# Altium PCB USBDAC_pcm2706.PcbDoc
Units mm, origin at the board's own origin, x right, y up, seen from the top; angles counter-clockwise.
Board outline 40 x 40 mm, 2 copper layers (Top Layer, Bottom Layer); 34 components, 30 nets, 122 pads, 25 vias.
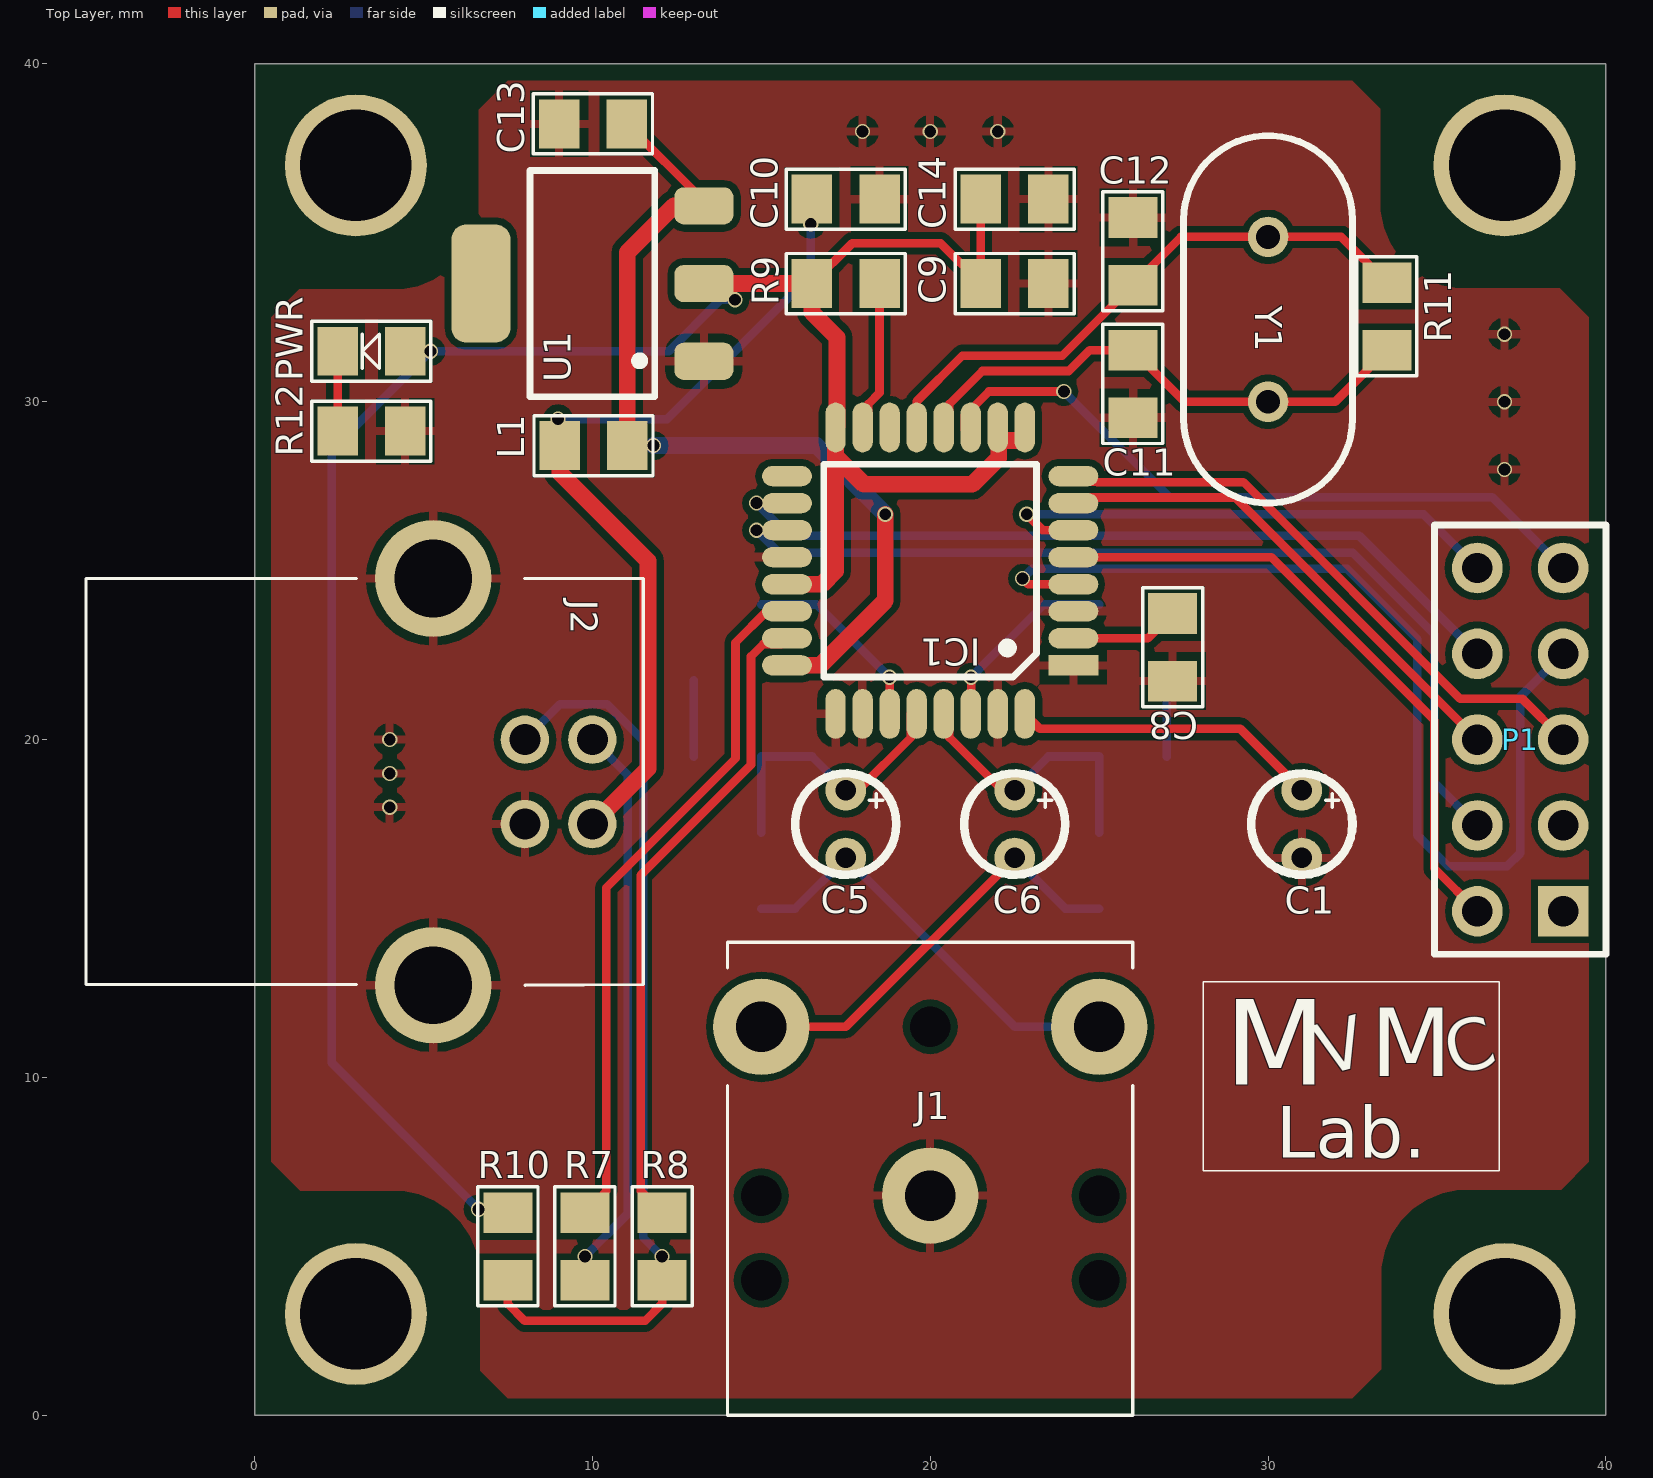
[diagram p0: Top Layer view]
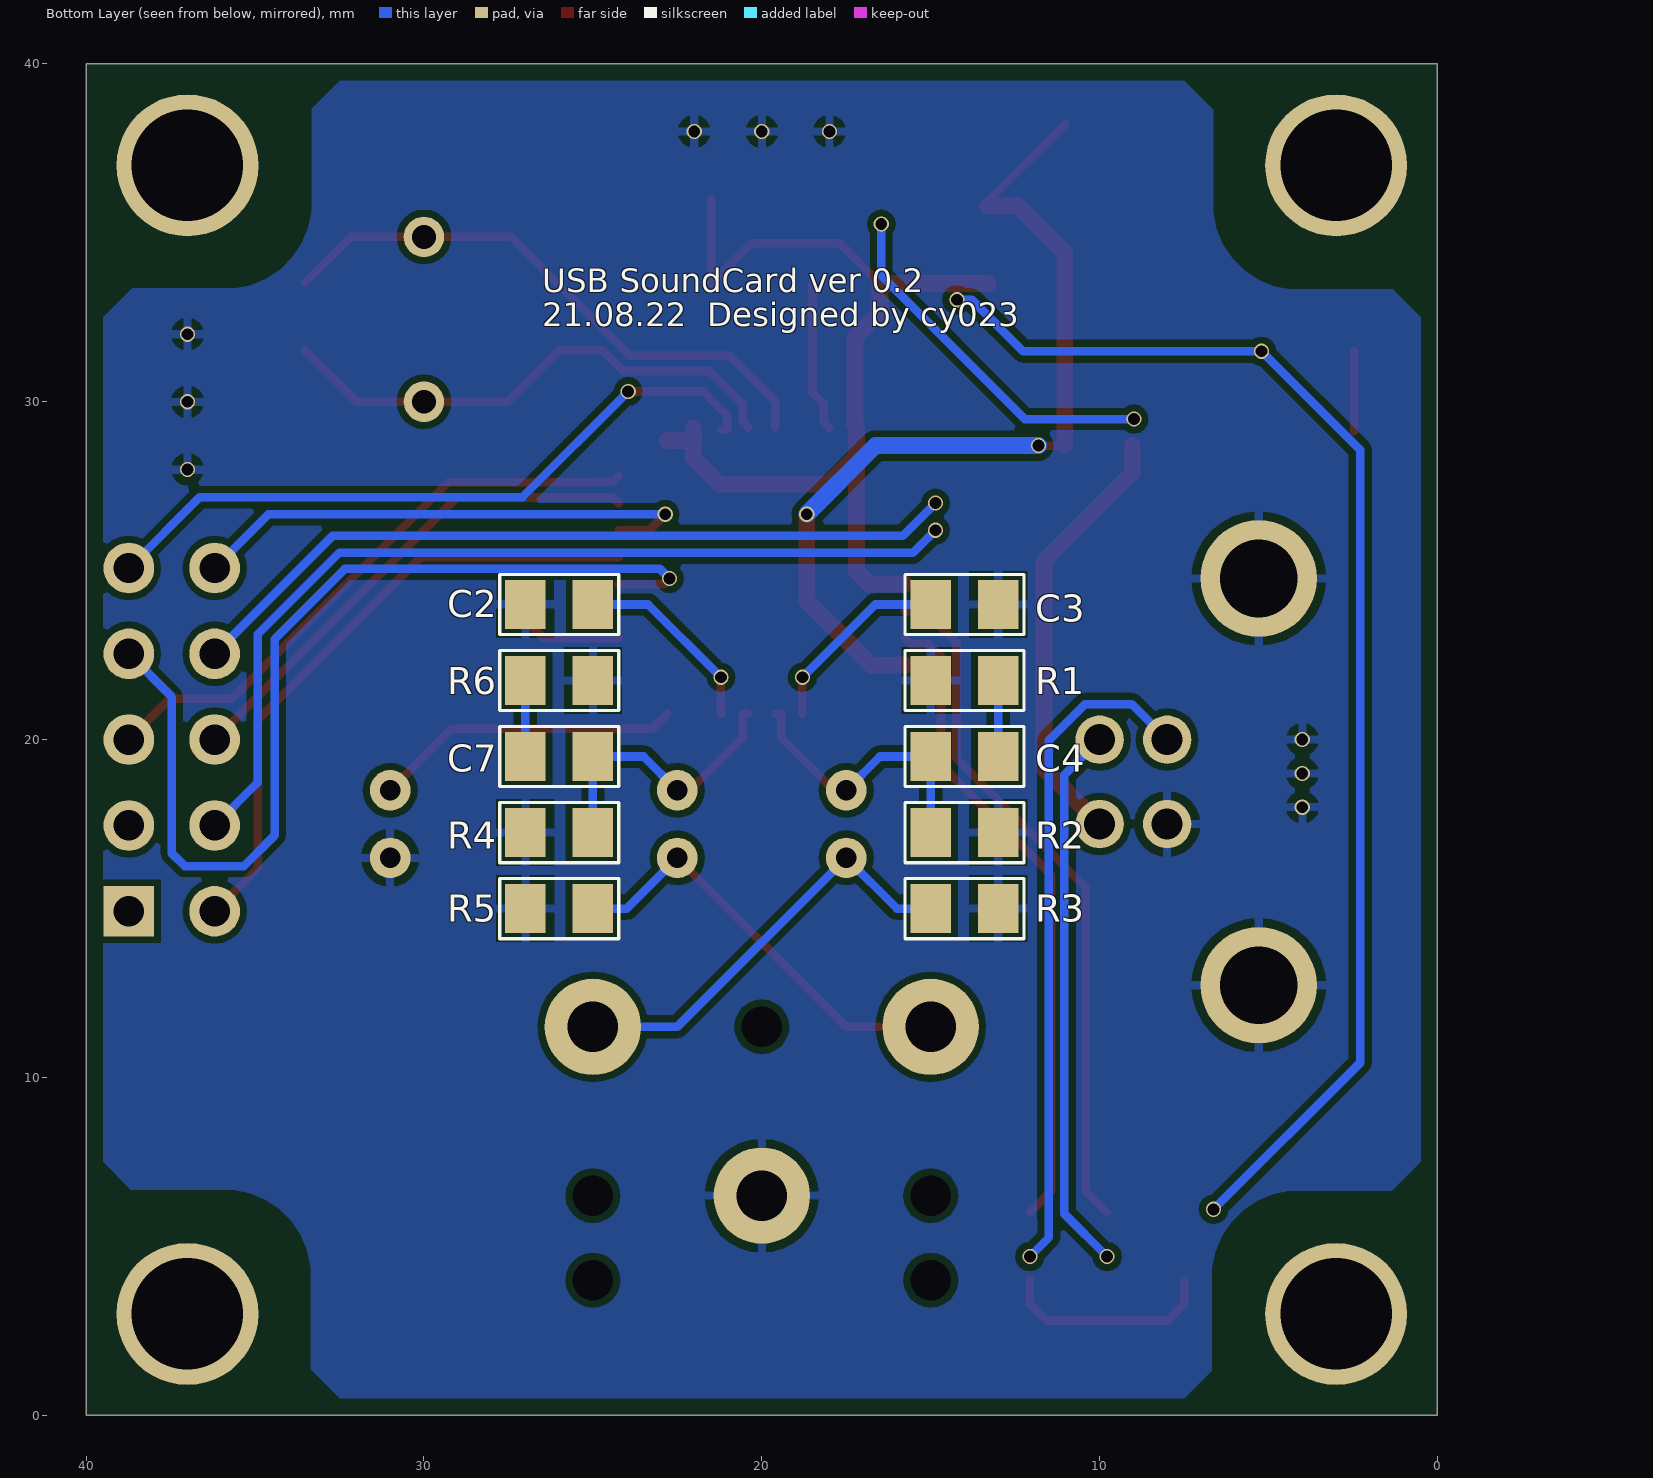
[diagram p1: Bottom Layer view, seen from below]
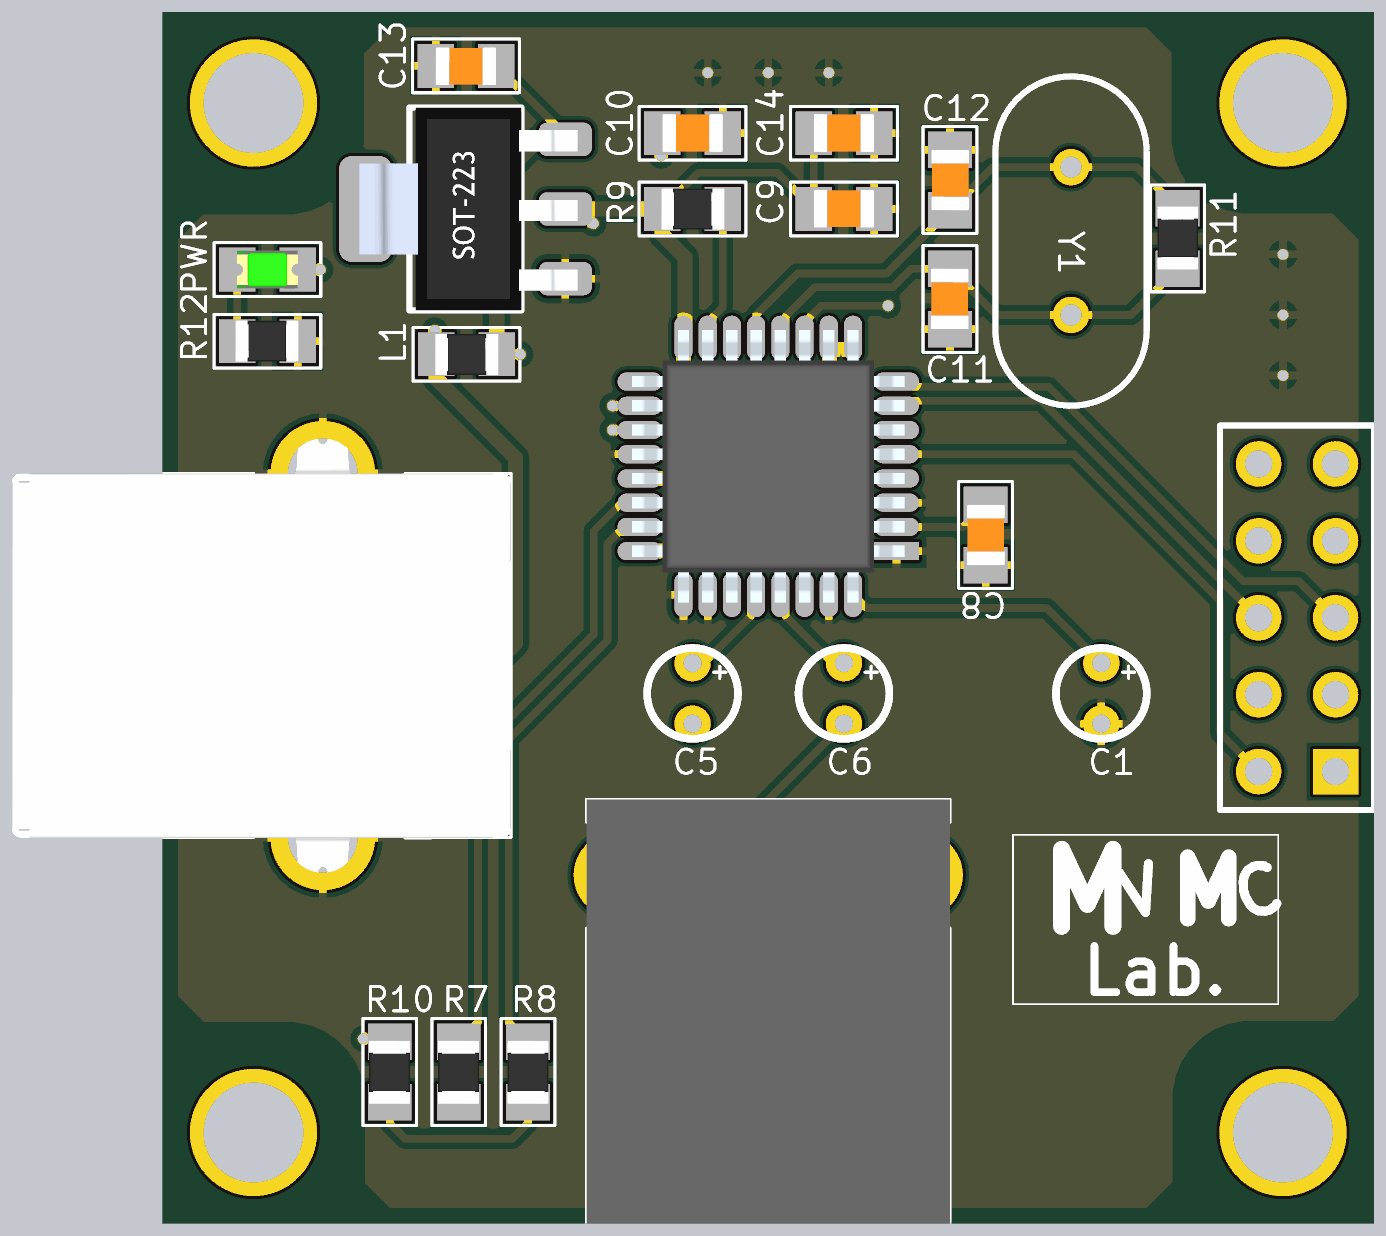
[diagram p2: 3D render of the assembled board from above, using the file's embedded part models]
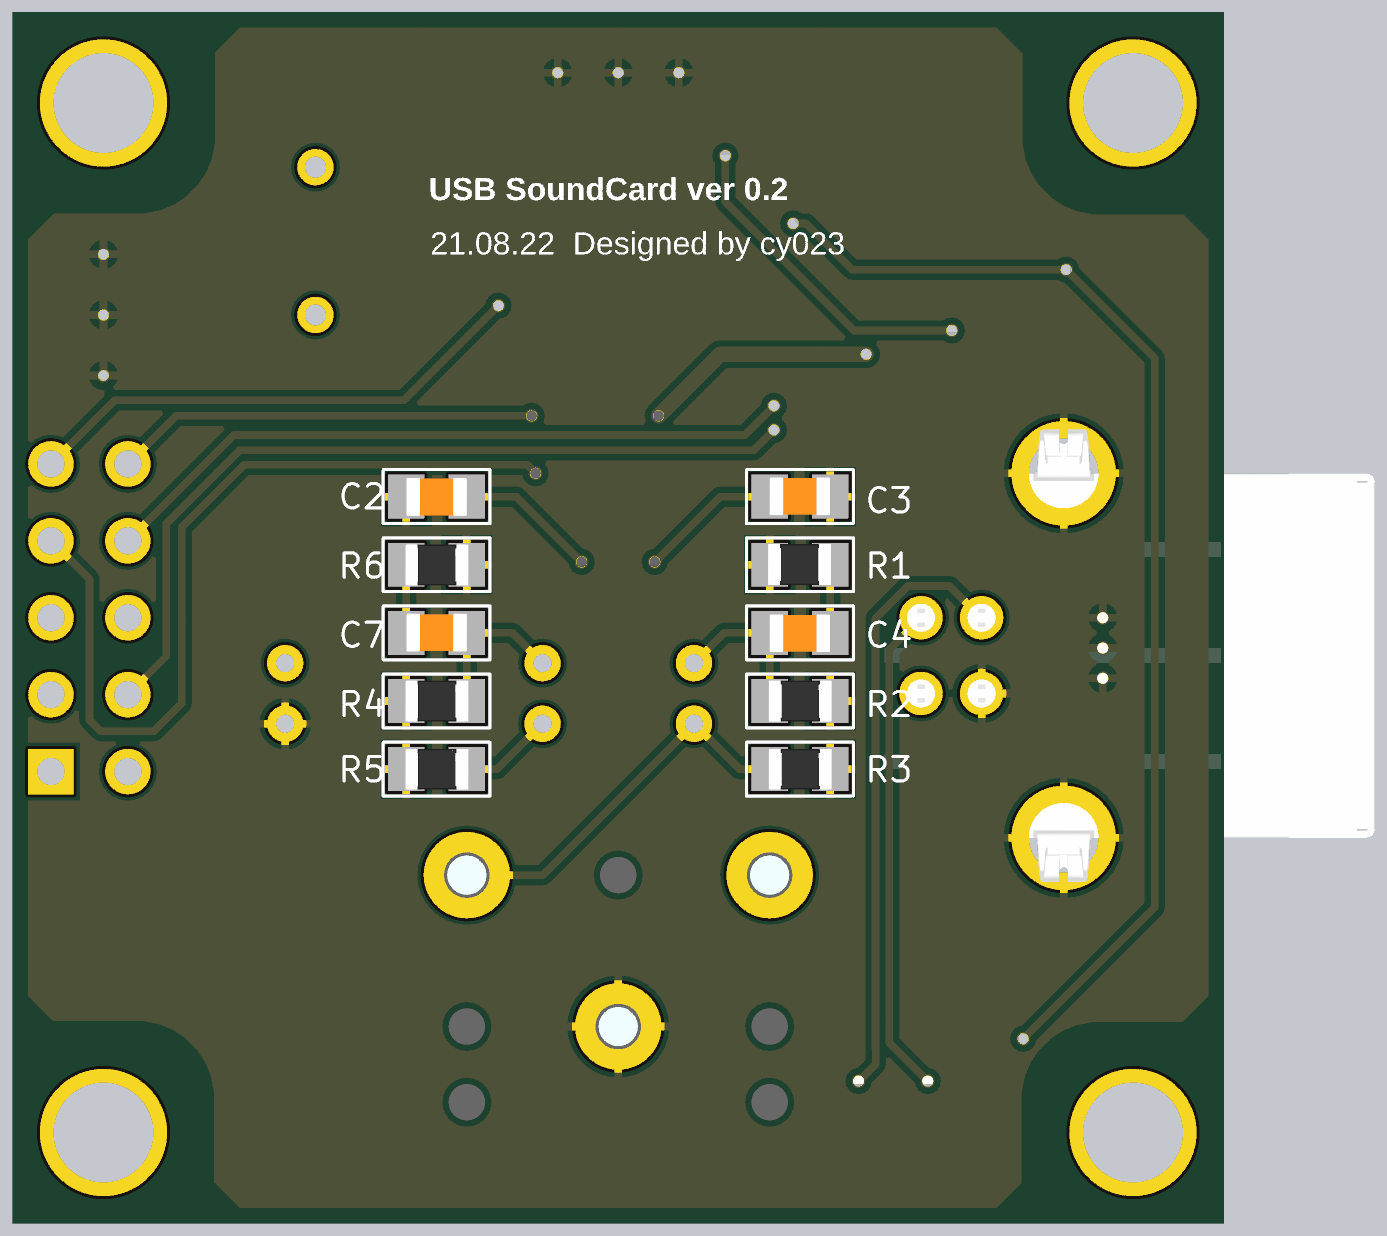
[diagram p3: 3D render of the assembled board from below, using the file's embedded part models]

## Layer stack, top to bottom
Top Solder: solder mask 0.0102, Solder Resist, Dk 3.5
Top Layer: signal copper 0.0356
Dielectric 1: dielectric 0.32, FR-4, Dk 4.8
Bottom Layer: signal copper 0.0356
Bottom Solder: solder mask 0.0102, Solder Resist, Dk 3.5

## Board outline
0,0 0,40 40,40 40,0

## Design rules (kind name [scope] priority, off if disabled: settings)
Clearance [All] p1: gap=0.203 ignorepadtopadclearanceinfootprint=TRUE
HoleSize [All] p1: absolutevalues=TRUE maxlimit=5.08 minlimit=0.254 maxpercent=80.000 minpercent=20.000
MinimumSolderMaskSliver [All] p1: minsoldermaskwidth=0.025
PolygonConnect [All] p1: connectstyle=Relief reliefconductorwidth=0.254 reliefentries=4 polygonreliefangle="90 Angle" airgapwidth=0.254
RoutingVias [All] p1: holewidth=0.406 width=0.61 viastyle="Through Hole" minholewidth=0.35 minwidth=0.45 maxholewidth=1.016 maxwidth=1.27
SilkToSilkClearance [All] p1: silktosilkclearance=0.025
SilkToSolderMaskClearance [IsPad] p1: minsilkscreentomaskgap=0 clearancetoexposedcopper=TRUE
SolderMaskExpansion [All] p1: expansion=0.102
Width [All] p1: maxlimit=1.27 minlimit=0.254 preferedwidth=0.254
26 further rules are at their usual default settings.

## Components (designator, comment, footprint, x,y, rotation, side; value= is the part's Value field where it differs from the comment)
C1 "10uF" dip_cap 31,17.5 r270 top
C2 "1uF" SMD0805_CAP 26,24 r270 bottom
C3 "1uF" SMD0805_CAP 14,24 r90 bottom
C4 "22nF" SMD0805_CAP 14,19.5 r270 bottom
C5 "100uF" dip_cap 17.5,17.5 r270 top
C6 "100uF" dip_cap 22.5,17.5 r270 top
C7 "22nF" SMD0805_CAP 26,19.5 r90 bottom
C8 "1uF" SMD0805_CAP 27.178,22.733 r0 top
C9 "1uF" SMD0805_CAP 22.5,33.5 r90 top
C10 "1uF" SMD0805_CAP 17.5,36 r90 top
C11 "22pF" SMD0805_CAP 26,30.528 r180 top
C12 "22pF" SMD0805_CAP 26,34.456 r0 top
C13 "10uF" SMD0805_CAP 10.017,38.227 r270 top
C14 "10uF" SMD0805_CAP 22.5,36 r90 top
IC1 "PCM2706PJT" QFP80P900X900X120-32N 20,25 r180 top
J1 "SJ1-3523NG" SJ13523NG 20,6.5 r90 top locked
J2 "SS-52300-001" SS52300001 10,20 r270 top
L1 "Bead" SMD0805 9.033,28.702 r0 top
P1 "Header 5X2" HDR2X5 38.735,14.92 r90 top locked
PWR "LED0" LED 3.459,31.496 r180 top (schematic designator PWR1)
R1 "1K" SMD0805 13,21.75 r0 bottom value=16R
R2 "3.3K" SMD0805 15,17.25 r180 bottom
R3 "3.3K" SMD0805 15,15 r180 bottom
R4 "3.3K" SMD0805 27,17.25 r180 bottom
R5 "3.3K" SMD0805 27,15 r180 bottom
R6 "1K" SMD0805 27,21.75 r180 bottom value=16R
R7 "22R" SMD0805 9.779,6 r270 top
R8 "22R" SMD0805 12.065,6 r270 top
R9 "1.5K" SMD0805 16.5,33.5 r0 top
R10 "1.5K" SMD0805 7.5,6 r270 top
R11 "1M" SMD0805 33.518,31.528 r90 top
R12 "1K" SMD0805 4.459,29.13 r180 top
U1 "NCP1117" SOT-223-2 10,33.5 r90 top
Y1 "12MHz" XTAL_DIP 30,30 r90 top

## Footprints (in the part's own frame and the unit in brackets; to place one, negate y for a bottom-side part, rotate by r counter-clockwise, add the part's x,y. Pads: shape width x height; smd on the part's side, far side on the other; paste and mask are expansions set on the pad)
dip_cap [mm]
  round 1.2 hole 0.6: 1(-1,0) 2(1,0)
  silkscreen extent -1.5,-1.5 1.5,1.5
HDR2X5 [mm] "Connector; Header; 5x2 Position"
  rect 1.5x1.5 hole 0.9: 1(0,0)
  round 1.5 hole 0.9: 2(0,2.54) 3(2.54,0) 4(2.54,2.54) 5(5.08,0) 6(5.08,2.54) 7(7.62,0) 8(7.62,2.54) 9(10.16,0) 10(10.16,2.54)
  silkscreen extent -1.27,-1.27 11.43,3.81
LED [mm]
  rect 1.2x1.45 smd: 1(-1,0) 2(1,0)
  silkscreen extent -1.76,-0.89 1.76,0.89, body extent -2.54,-0.63 1.01,0.62, height 1.1
QFP80P900X900X120-32N [mm]
  rect 1.475x0.6 smd: 1(-4.238,2.8)
  oval 1.475x0.6 smd: 2(-4.238,2) 3(-4.238,1.2) 4(-4.238,0.4) 5(-4.238,-0.4) 6(-4.238,-1.2) 7(-4.238,-2) 8(-4.238,-2.8) 17(4.238,-2.8) 18(4.238,-2) 19(4.238,-1.2) 20(4.238,-0.4) 21(4.238,0.4) 22(4.238,1.2) 23(4.238,2) 24(4.238,2.8)
  oval 0.6x1.475 smd: 9(-2.8,-4.238) 10(-2,-4.238) 11(-1.2,-4.238) 12(-0.4,-4.238) 13(0.4,-4.238) 14(1.2,-4.238) 15(2,-4.238) 16(2.8,-4.238) 25(2.8,4.238) 26(2,4.238) 27(1.2,4.238) 28(0.4,4.238) 29(-0.4,4.238) 30(-1.2,4.238) 31(-2,4.238) 32(-2.8,4.238)
  silkscreen extent -3.15,-3.15 3.15,3.15, body extent -4.5,-4.5 4.5,4.5, height 1.2
SJ13523NG [mm]
  round 2.85 hole 1.5: 1(0,0) 2(5,-5) 3(5,5)
  round 0.6 hole 1.2 unplated: MH1(-2.5,5) MH2(0,5) MH3(-2.5,-5) MH4(0,-5) MH5(5,0)
  silkscreen extent -6.5,-6 7.5,6, body extent -6.5,-6 7.5,6, height 5.7
SMD0805 [mm]
  rect 1.2x1.45 smd: 1(0,0) 2(2,0)
  silkscreen extent -0.76,-0.89 2.76,0.89, body extent -0.04,-0.68 2.06,0.67, height 0.6
SMD0805_CAP [mm]
  rect 1.45x1.2 smd: 1(0,-1) 2(0,1)
  silkscreen extent -0.89,-1.76 0.89,1.76, body extent -0.61,-1 0.64,1, height 0.8
SOT-223-2 [mm] "SOT-223/SC-73; 4 Leads; Body 6.7 x 7.3 mm, inc. leads (LxW max)"
  rrect50% 1.1x1.75 smd: 1(-2.3,-3.3) 2(0,-3.3) 3(2.3,-3.3)
  rrect50% 3.5x1.75 smd: 4(0,3.3)
  silkscreen extent -3.35,-1.85 3.35,1.85, body extent -3.35,-3.7 3.35,3.5, height 1.85
SS52300001 [mm]
  round 1.431 hole 0.92: 1(2.5,0) 2(2.5,-2) 3(0,0) 4(0,-2)
  round 3.45 hole 2.3: MH1(-4.77,-4.71) MH2(7.27,-4.71)
  silkscreen extent -4.77,-14.99 7.27,1.51, body extent -6.22,-14.99 8.72,1.51, height 10.62
XTAL_DIP [mm]
  round 1.2 hole 0.7: 1(0,0) 2(4.88,0)
  silkscreen extent -3,-2.5 7.88,2.5, body extent -3.19,-2.48 8.16,2.52, height 3.68

## Part data
C1 C5 C6: library part "Cap Pol1", "Polarized Capacitor (Radial)", LatestRevisionDate=17-Jul-2002, LatestRevisionNote="Re-released for DXP Platform.", PackageDescription="Polarized Capacitor (Radial); 2 Leads", PackageReference=RB7.6-15, Published=8-Jun-2000, Publisher="Altium Limited"
C2 C3 C4 C7 C8 C9 C10 C11 C12 C13 C14: library part "Cap Semi", "Capacitor (Semiconductor SIM Model)", LatestRevisionDate=29-May-2009, LatestRevisionNote="IPC-7351 Footprint Added.", PackageDescription="Chip Capacitor", PackageReference=C1206, Published=8-Jun-2000, Publisher="Altium Limited"
IC1: "Integrated Circuit", Manufacturer_Name="Texas Instruments", Datasheet Link=http://www.ti.com/lit/gpn/pcm2706, Height=1.2mm, Manufacturer_Part_Number=PCM2706PJT
J1: "Connector", Manufacturer_Name="CUI Inc.", Datasheet Link=https://www.arrow.com/en/products/sj1-3523ng/cui-devices, Height=5.6mm, Manufacturer_Part_Number=SJ1-3523NG
J2: "Connector", Manufacturer_Name=Bel, Datasheet Link=https://belfuse.com/resources/datasheets/stewartconnector/ds-stw-usb-2.0-type-b-connectors.pdf, Height=10.82mm, Manufacturer_Part_Number=SS-52300-001
L1: library part Inductor, "Inductor", Code_IEC=1005, Code_JEITA=0402, LatestRevisionDate=29-May-2009, LatestRevisionNote="IPC-7351 Footprint Added.", PackageDescription="Chip Inductor", PackageReference=0402-A, Published=8-Jun-2000, Publisher="Altium Limited"
P1: "Header, 5-Pin, Dual row", LatestRevisionDate=17-Jul-2002, LatestRevisionNote="Re-released for DXP Platform.", Publisher="Altium Limited"
PWR: "Typical INFRARED GaAs LED", LatestRevisionDate=08-Jul-2005, LatestRevisionNote="Mech Layer 1 removed.", PackageDescription="LED; 2 Leads", PackageReference=LED-0, Published=8-Jun-2000, Publisher="Altium Limited"
R1 R2 R3 R4 R5 R6 R7 R8 R9 R10 R11 R12: library part "Res Semi", "Semiconductor Resistor", LatestRevisionDate=17-Jul-2002, LatestRevisionNote="Re-released for DXP Platform.", PackageDescription="Axial Device, Thru-Hole; 2 Leads; 0.5 in Pin Spacing", PackageReference=AXIAL-0.5, Published=8-Jun-2000, Publisher="Altium Limited"
U1: "IC REG 5V 1A DPAC"
Y1: library part XTAL, "Crystal Oscillator 8MHz", LatestRevisionDate=17-Jul-2002, LatestRevisionNote="Re-released for DXP Platform.", PackageDescription="Crystal, Thru-Hole; 2 Leads; Body 3.1 x 8.2 mm (Dia.xH)", PackageReference=R38, Published=8-Jun-2000, Publisher="Altium Limited"

## Free pads (board coordinates)
  round 4.2 hole 3.3: ""(3,3) ""(3,37) ""(37,3) ""(37,37)

## Via types
v1: diameter 0.45, hole 0.35, Top Layer to Bottom Layer, tented both sides, 25 vias

## Nets (pads, with @x,y where several pads share a name; then routed paths per layer and width w, separated by ;. In a path a pad name is that pad's centre, name@x,y a point inside that pad or via, vN(x,y) a via of type N, cw(c..) or ccw(c..) an arc to the next point about the centre after c; other vN are vias at no path point)
D+: IC1.23 R8.1 | length 19.4
  Top Layer w0.254: R8.1 11.43,6.635 11.43,15.99 14.694,19.255 14.694,22.461 15.063,22.83 15.592,22.83 IC1.23
D-: IC1.22 R7.1 | length 20.6
  Top Layer w0.254: R7.1 10.414,6.635 10.414,15.621 14.237,19.444 14.237,22.873 15.164,23.8 IC1.22
GND: C1.2 C2.1 C3.1 C8.1 C9.1 C10.1 C11.2 C12.2 C13.1 C14.1 IC1.1 IC1.3 IC1.20 IC1.25 IC1.26 IC1.31 J1.1 J2.2 J2.MH1 J2.MH2 R1.2 R2.2 R3.2 R4.1 R5.1 R6.2 R12.1 U1.1
  other v1: 4,18 4,19 4,20 37,28 37,30 37,32 18,38 20,38 22,38
MUTE: IC1.6 P1.10 | length 15.6
  Top Layer w0.254: v1(22.86,26.67) 23.33,26.2 IC1.6
  Bottom Layer w0.254: v1(22.86,26.67) 34.605,26.67 P1.10
NetC1_1: C1.1 IC1.32 | length 9.1
  Top Layer w0.254: IC1.32 23.242,20.32 29.18,20.32 C1.1
NetC2_2: C2.2 IC1.30 | length 5.8
  Top Layer w0.254: IC1.30 21.209,20.771 v1(21.209,21.844)
  Bottom Layer w0.254: v1(21.209,21.844) 23.365,24 C2.2
NetC3_2: C3.2 IC1.27 | length 5.8
  Top Layer w0.254: v1(18.796,21.844) 18.8,21.84 IC1.27
  Bottom Layer w0.254: C3.2 16.64,24 v1(18.796,21.844)
NetC4_2: C4.2 R1.1 | length 2.2
  Bottom Layer w0.254: C4.2 R1.1
NetC5_2: C5.2 J1.2 R3.1 | length 12.7
  Bottom Layer w0.254: R3.1 16,15 C5.2 22.5,11.5 J1.2
NetC6_2: C6.2 J1.3 R5.2 | length 12.7
  Top Layer w0.254: J1.3 17.5,11.5 C6.2
  Bottom Layer w0.254: C6.2 24,15 R5.2
NetC7_2: C7.2 R6.1 | length 2.2
  Bottom Layer w0.254: C7.2 R6.1
NetC8_2: C8.2 IC1.2 | length 3.2
  Top Layer w0.254: IC1.2 26.445,23 C8.2
NetC11_1: C11.1 IC1.12 R11.1 Y1.1 | length 15.6
  Top Layer w0.254: IC1.12 20.57,29.408 20.57,29.937 21.545,30.912 24.103,30.912 24.719,31.528 C11.1 27.528,30 Y1.1 31.99,30 R11.1
NetC12_1: C12.1 IC1.13 R11.2 Y1.2 | length 17.3
  Top Layer w0.254: IC1.13 19.6,30.014 20.955,31.369 23.913,31.369 C12.1 27.424,34.88 Y1.2 32.166,34.88 R11.2
NetIC1_15: IC1.15 R9.2 | length 4.5
  Top Layer w0.254: IC1.15 18.17,29.408 18.17,29.937 18.5,30.267 R9.2
NetJ2_3: J2.3 R7.2 | length 16.3
  Bottom Layer w0.254: v1(9.779,4.699) 11.046,5.966 11.046,18.954 J2.3
NetJ2_4: J2.4 R8.2 R10.2 | length 26.3
  Top Layer w0.254: R10.2 7.5,3.295 8.001,2.794 11.557,2.794 12.065,3.302 R8.2
  Bottom Layer w0.254: J2.4 9.046,21.046 10.433,21.046 11.503,19.976 11.503,5.776 11.5,5.773 11.5,5.264 v1(12.065,4.699)
NetPWR1_2: PWR.2 R12.2 | length 2.4
  Top Layer w0.254: R12.2 PWR.2
nSSPND: IC1.11 P1.9 | length 20.8
  Top Layer w0.254: IC1.11@21.2,29.175 21.03,29.175 21.03,29.597 21.739,30.306 v1(23.956,30.306)
  Bottom Layer w0.254: v1(23.956,30.306) 27.083,27.178 36.637,27.178 P1.9
NXTTRK: IC1.5 P1.2 | length 18.9
  Top Layer w0.254: IC1.5 30.099,25.4 34.926,20.573 34.926,16.189 P1.2
PLAY/PAUSE: IC1.4 P1.7 | length 30.1
  Top Layer w0.254: v1(22.733,24.77) 22.903,24.6 IC1.4
  Bottom Layer w0.254: v1(22.733,24.77) 23.018,25.055 32.337,25.055 34.417,22.975 34.417,17.169 35.33,16.256 37.084,16.256 37.465,16.637 37.465,21.27 P1.7
PRETRK: IC1.19 P1.4 | length 27.5
  Bottom Layer w0.254: v1(14.859,26.2) 15.532,25.527 32.512,25.527 34.925,23.114 34.925,18.73 P1.4
STOP: IC1.18 P1.8 | length 23.2
  Bottom Layer w0.254: v1(14.859,27) 15.824,26.035 32.7,26.035 P1.8
VBUS: C10.2 J2.1 L1.1 | length 23.7
  Top Layer w0.5: L1.1 9.033,27.903 11.649,25.286 11.649,19.149 J2.1
  Bottom Layer w0.254: v1(8.986,29.488) 12.216,29.488 16.463,33.735 v1(16.463,35.259)
VCC3V3: C9.2 C14.2 IC1.9 IC1.10 IC1.16 IC1.21 PWR.1 R9.1 R10.1 U1.2 | length 67.7
  Top Layer w0.254: R9.1 17.695,34.695 20.305,34.695 C9.2 C14.2
  Top Layer w0.5: U1.2 R9.1 16.5,32.649 17.247,31.902 17.247,29.987 17.247,29.285 IC1.16 17.2,28.393 ; IC1.21 16.803,24.6 17.2,24.997 17.2,28.393 ; IC1.9@22.8,28.857 IC1.10@22.028,28.857 ; 17.2,28.393 18.034,27.559 21.246,27.559 22.028,28.341 IC1.10@22.028,28.857 ; IC1.10@22.028,28.857 22,28.857 22.028,29.21 IC1.10@22.028,28.857
  Bottom Layer w0.254: v1(6.626,6.096) 2.286,10.436 2.286,28.575 v1(5.207,31.496) 12.264,31.496 13.788,33.02 v1(14.224,33.02)
VCC5V: C13.2 IC1.24 L1.2 U1.3 | length 26.9
  Top Layer w0.254: C13.2 13.3,35.944 U1.3 ; L1.2 v1(11.811,28.702) ; IC1.24 IC1.24@15.932,22.37
  Top Layer w0.5: L1.2 11.033,34.425 12.408,35.8 U1.3 ; IC1.24 16.757,22.2 16.891,22.334 18.669,24.112 v1(18.669,26.67)
  Bottom Layer w0.5: v1(11.811,28.702) 16.637,28.702 v1(18.669,26.67)
VOL+: IC1.7 P1.6 | length 15
  Top Layer w0.254: IC1.7 24.405,27.167 29.028,27.167 P1.6
VOL-: IC1.8 P1.5 | length 17.7
  Top Layer w0.254: IC1.8 24.408,27.63 24.937,27.63 24.942,27.624 29.27,27.624 35.685,21.209 37.526,21.209 P1.5
VOUTL: C4.1 C5.1 IC1.28 R2.1 | length 8.6
  Top Layer w0.254: C5.1 17.867,18.5 19.43,20.063 19.43,20.762 IC1.28
  Bottom Layer w0.254: R2.1 C4.1 16.5,19.5 C5.1
VOUTR: C6.1 C7.1 IC1.29 R4.2 | length 8.8
  Top Layer w0.254: IC1.29 20.57,20.762 20.57,20.063 22.317,18.317 C6.1
  Bottom Layer w0.254: C6.1 23.5,19.5 C7.1 R4.2
pads on no net: IC1.14 IC1.17 J1.MH1 J1.MH2 J1.MH3 J1.MH4 J1.MH5 P1.1 P1.3 U1.4

## Polygon pours and split planes (outlines as drawn)
GND on Bottom Layer "Bottom Layer-GND" (solid, pour order 12): 7.5,0.5 32.5,0.5 39.5,7.5 39.5,32.5 32.5,39.5 7.5,39.5 0.5,32.5 0.5,7.5
GND on Top Layer "Top Layer-GND" (solid, pour order 14): 7.5,0.5 32.5,0.5 39.5,7.5 39.5,32.5 32.5,39.5 7.5,39.5 0.5,32.5 0.5,7.5

## Other copper
Top Layer:
  pour cut-out: 6.675,0 6.675,4.102 ccw(c4.135,4.102) 4.135,6.642 0,6.642 0,0
  pour cut-out: 40,6.675 35.898,6.675 ccw(c35.898,4.135) 33.358,4.135 33.358,0 40,0
  pour cut-out: 33.325,40 33.325,35.898 ccw(c35.865,35.898) 35.865,33.358 40,33.358 40,40
  pour cut-out: 0,33.325 4.102,33.325 ccw(c4.102,35.865) 6.642,35.865 6.642,40 0,40
Bottom Layer:
  pour cut-out: 6.675,0 6.675,4.102 ccw(c4.135,4.102) 4.135,6.642 0,6.642 0,0
  pour cut-out: 40,6.675 35.898,6.675 ccw(c35.898,4.135) 33.358,4.135 33.358,0 40,0
  pour cut-out: 33.325,40 33.325,35.898 ccw(c35.865,35.898) 35.865,33.358 40,33.358 40,40
  pour cut-out: 0,33.325 4.102,33.325 ccw(c4.102,35.865) 6.642,35.865 6.642,40 0,40

## Silkscreen, mask and mechanical layers (free items; w line width, h text height)
Top Overlay:
  lines w0.051: 28.083,7.241 28.083,12.829 36.846,12.829 36.846,7.241 28.083,7.241
  text "V" at 31.639,10.035 h1.52 r15
  text "M" at 33.036,10.035 h2.03
  text "C" at 35.449,10.035 h1.52 r15
  text "M" at 28.718,9.781 h2.54
  text "Lab." at 30.242,7.622 h1.52
Bottom Overlay:
  text "USB SoundCard ver 0.2" at 26.5,33 h1.2
  text "21.08.22  Designed by cy023" at 26.5,32 h1.2
Mechanical 1:
  the board outline again, w0.254